# Altium PCB ButtonInterface.PcbDoc
Units mm, origin at the board's own origin, x right, y up, seen from the top; angles counter-clockwise.
Board outline 57.82 x 17.85 mm, 2 copper layers (Top Layer, Bottom Layer); 9 components, 9 nets, 34 pads, 0 vias.
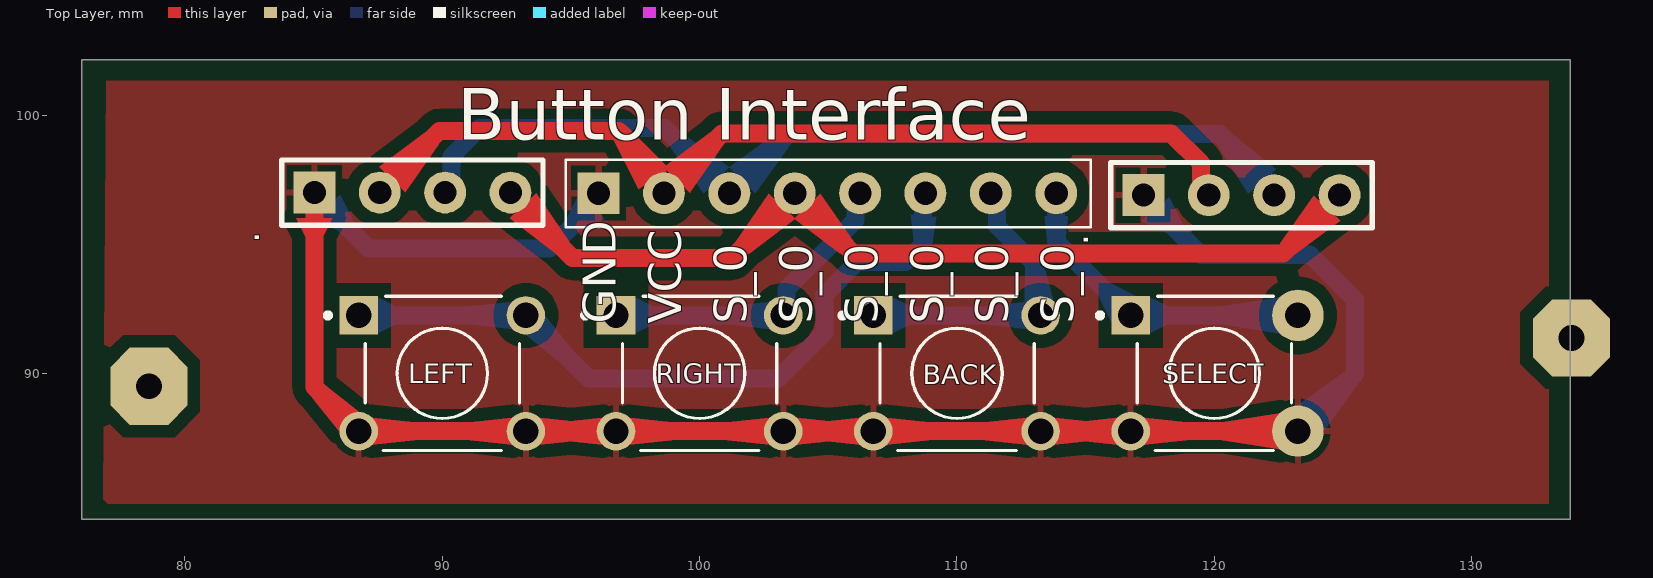
[diagram p0: Top Layer view]
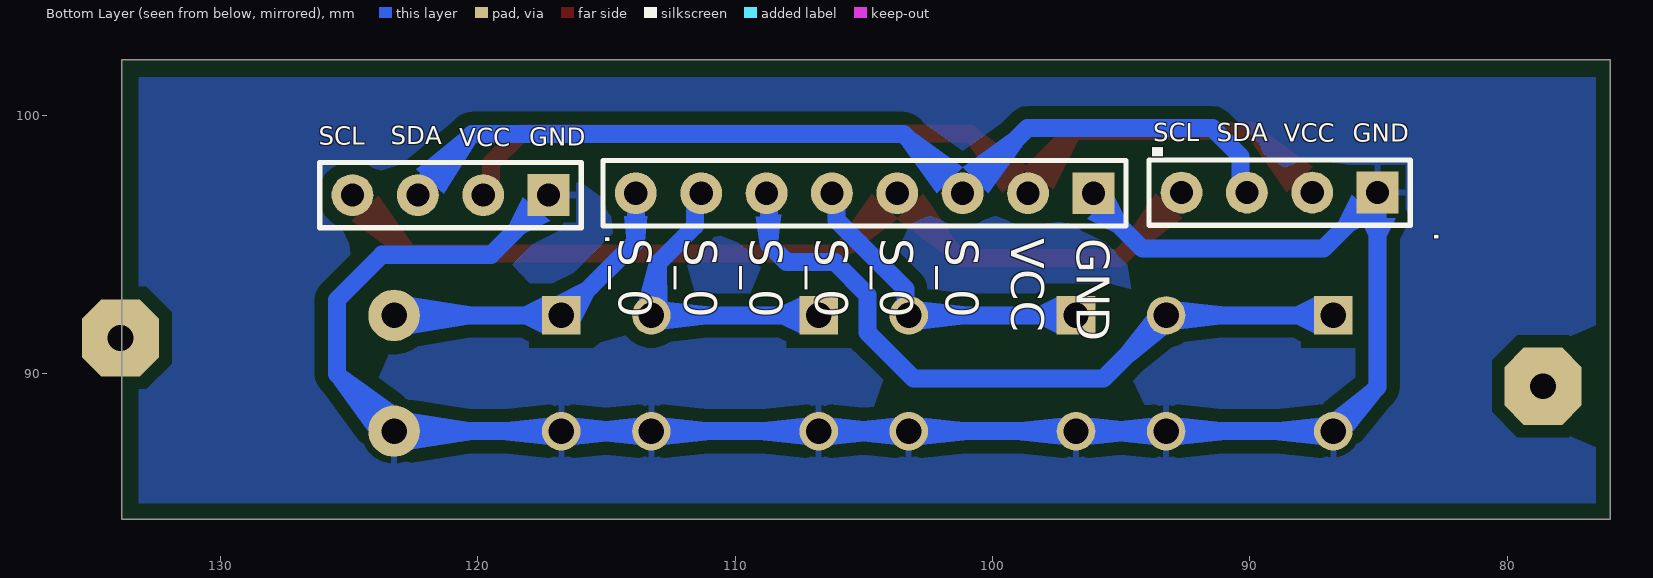
[diagram p1: Bottom Layer view, seen from below]

## Layer stack, top to bottom
Top Solder: solder mask 0.0102, Solder Resist, Dk 3.5
Top Layer: signal copper 0.0356
Dielectric 1: dielectric 0.32, FR-4, Dk 4.8
Bottom Layer: signal copper 0.0356
Bottom Solder: solder mask 0.0102, Solder Resist, Dk 3.5

## Board outline
76,84.325 76,102.175 133.825,102.175 133.825,84.325

## Design rules (kind name [scope] priority, off if disabled: settings)
Clearance [All] p1: gap=0.5 ignorepadtopadclearanceinfootprint=TRUE
PolygonConnect [All] p1: connectstyle=Relief reliefconductorwidth=0.254 reliefentries=4 polygonreliefangle="90 Angle" airgapwidth=0.254
RoutingVias [All] p1: holewidth=0.711 width=1.27 viastyle="Through Hole" minholewidth=0.711 minwidth=1.27 maxholewidth=0.711 maxwidth=1.27
SolderMaskExpansion [All] p1: expansion=0.102 istentingtop=FALSE
Width [All] p1: maxlimit=1 minlimit=0.254 preferedwidth=0.7
30 further rules are at their usual default settings.

## Components (designator, comment, footprint, x,y, rotation, side; value= is the part's Value field where it differs from the comment)
BACK "BACK" SW_1825910-6-4#1 110,90 r0 top (schematic designator SW2)
CN1 "IO" CON.HDR1X4 117.245,96.925 r0 bottom
CN2 "CON.HDR1x8" CON1X8N 96.075,97 r0 bottom
CN3 "IO" CON.HDR1X4 85.03,97.025 r0 bottom
LEFT "LEFT" SW_1825910-6-4#1 90,90 r0 top (schematic designator SW3)
RIGHT "RIGHT" SW_1825910-6-4#1 100,90 r0 top (schematic designator SW4)
SELECT "SELECT" SW_1825910-6-4#2 120,90 r0 top (schematic designator SW1)
? "Comment" CP 133.875,91.375 r0 top
? "Comment" CP 78.6,89.5 r0 top

## Footprints (in the part's own frame and the unit in brackets; to place one, negate y for a bottom-side part, rotate by r counter-clockwise, add the part's x,y. Pads: shape width x height; smd on the part's side, far side on the other; paste and mask are expansions set on the pad)
CON1X8N [mil]
  rect 64x64 hole 35.43: 1(0,0)
  round 64 hole 35.43: 2(100,0) 3(200,0) 4(300,0) 5(400,0) 6(500,0) 7(600,0) 8(700,0)
  silkscreen extent -50,-50 750,50, body extent -50,-50 750,50, height 350
CON.HDR1X4 [mil]
  rect 64x64 hole 35.43: 1(0,0)
  round 64 hole 35.43: 2(100,0) 3(200,0) 4(300,0)
  silkscreen extent -50,-50 350,50, body extent -50,-50 350,50, height 350
CP [mm] "Connect Pad, 1-Pin"
  oct 3x3 hole 1: 1(0,0)
SW_1825910-6-4#1 [mm]
  rect 1.498x1.498 / inner round 1.498 / far side rect 1.498x1.498 hole 0.99: 1(-3.25,2.25)
  round 1.498 hole 0.99: 2(3.25,2.25) 3(-3.25,-2.25) 4(3.25,-2.25)
  silkscreen extent -4.54,-3 3,3, body extent -3,-3.9 3,3.9, height 5.01
SW_1825910-6-4#2 [mm]
  rect 1.498x1.498 / inner round 1.498 / far side rect 1.498x1.498 hole 0.99: 1(-3.25,2.25)
  round 2 hole 0.99: 2(3.25,2.25) 4(3.25,-2.25)
  round 1.498 hole 0.99: 3(-3.25,-2.25)
  silkscreen extent -4.54,-3 3,3, body extent -3,-3.9 3,3.9, height 5.01

## Part data
BACK LEFT RIGHT SELECT: library part 1825910-6, "Switch Push Button OFF (ON) SPST Round Button 0.05A 24VDC Momentary Contact PC Pins Thru-Hole", Package=None, Check_prices=https://www.snapeda.com/parts/1825910-6/TE+Connectivity+ALCOSWITCH+Switches/view-part/?ref=eda, Digi-Key_Part_Number=450-1650-ND, MF="TE Connectivity", MP=1825910-6, Purchase-URL=https://pricing.snapeda.com/search/part/1825910-6/?ref=eda, SnapEDA_Link=https://www.snapeda.com/parts/1825910-6/TE+Connectivity+ALCOSWITCH+Switches/view-part/?ref=snap
CN1 CN3: library part CON.HDR1x4, "Header 1x4", ComponentLink1Description="Digikey Part link", ComponentLink2Description="Open DataSheet", ComponentLink2URL=H:\LIBRARY\LIBRARY.Datasheet\, Publisher="Hoang Nguyen"
CN2: "Header 1x8", ComponentLink1Description="Digikey Part link", ComponentLink2Description="Open DataSheet", ComponentLink2URL=H:\LIBRARY\LIBRARY.Datasheet\, Publisher="Hoang Nguyen"

## Nets (pads, with @x,y where several pads share a name; then routed paths per layer and width w, separated by ;. In a path a pad name is that pad's centre, name@x,y a point inside that pad or via, vN(x,y) a via of type N, cw(c..) or ccw(c..) an arc to the next point about the centre after c; other vN are vias at no path point)
+3.3: CN1.2 CN2.2 CN3.2 | length 36.1
  Top Layer w0.7: CN3.2@87.575,97.05 87.575,97.106 89.894,99.425 96.852,99.425 98.366,97.911 ; CN2.2 98.615,97.06 98.615,97.076 100.864,99.325 118.322,99.325 119.476,98.171 119.476,97.199 CN1.2@119.725,96.95
+5: 
GPIO17: CN2.5 RIGHT.1 RIGHT.2 | length 12.6
  Bottom Layer w0.7: RIGHT.1@96.675,92.3 96.675,92.25 RIGHT.1 RIGHT.2 ; RIGHT.2@103.196,92.304 103.374,92.482 103.374,93.271 105.152,95.049 106.058,95.955 106.058,96.823 CN2.5
GPIO18: CN2.6 LEFT.1 LEFT.2 | length 28
  Bottom Layer w0.7: LEFT.1 LEFT.2@93.225,92.25 ; LEFT.2 LEFT.2@93.225,92.25 ; CN2.6 108.683,96.908 108.683,95.008 108,94.325 106.125,94.325 104.85,93.05 104.85,91.589 103.061,89.8 95.675,89.8 LEFT.2@93.225,92.25
GPIO19: BACK.1 BACK.2 CN2.7 | length 11.9
  Bottom Layer w0.7: BACK.1 BACK.2@113,92.25 ; CN2.7@111.35,96.925 111.546,96.729 111.546,95.732 113,94.278 BACK.2@113,92.25 ; BACK.2@113.138,92.238 BACK.2@113.2,92.175 ; BACK.2 BACK.2@113,92.25
GPIO23: CN2.8 SELECT.1 SELECT.2 | length 12.6
  Bottom Layer w0.7: CN2.8 113.855,95.12 116.326,92.649 116.351,92.649 SELECT.1 ; SELECT.1@116.75,92.225 SELECT.1 ; SELECT.2@123.275,92.175 123.275,92.25 SELECT.2 SELECT.1
"Out -": BACK.3 BACK.4 CN1.1 CN2.1 CN3.1 LEFT.3 LEFT.4 RIGHT.3 RIGHT.4 SELECT.3 SELECT.4 | length 121.8
  Top Layer w0.7: CN3.1 85.03,89.47 86.7,87.8 LEFT.3@86.7,87.775 ; LEFT.3 LEFT.4 RIGHT.3 RIGHT.4 BACK.3@106.7,87.75 ; BACK.3 BACK.4 SELECT.3 SELECT.4 SELECT.4@123.35,87.75
  Bottom Layer w0.7: CN3.1@84.95,97 CN3.1@85.03,97 ; LEFT.4@93.225,87.75 LEFT.3 85.03,89.47 CN3.1@85.03,97 ; LEFT.4 RIGHT.3@96.7,87.75 ; CN2.1 96.075,96.75 94.175,94.85 87.129,94.85 85.68,96.299 85.68,96.375 85.055,97 CN3.1@85.03,97 ; RIGHT.3 RIGHT.4 BACK.3 BACK.4 SELECT.3@116.675,87.75 ; SELECT.3 SELECT.4@123.15,87.75 ; CN1.1 117.895,96.275 117.895,96.199 119.486,94.607 123.718,94.607 125.475,92.85 125.475,89.975 SELECT.4
SCL: CN1.4 CN2.4 CN3.4 | length 36.3
  Top Layer w0.7: CN3.4@92.575,97 92.575,96.965 95.065,94.475 101.246,94.475 CN2.4@103.695,96.924 ; CN2.4 CN2.4@103.695,96.924 ; CN1.4@124.825,96.875 124.825,96.809 122.666,94.65 105.969,94.65 CN2.4@103.695,96.924
SDA: CN1.3 CN2.3 CN3.3 | length 36.9
  Bottom Layer w0.7: CN3.3@90.075,97.125 90.359,97.409 90.359,98.434 91.45,99.525 98.63,99.525 CN2.3@101.055,97.1 ; CN2.3 103.455,99.3 120.225,99.3 122.275,97.25 CN1.3@122.275,96.875
pads on no net: ?.1

## Polygon pours and split planes (outlines as drawn)
"Out -" on Bottom Layer "OUT_-_L02_P000" (solid, pour order 0): 76.55,101.5 133.175,101.5 133.175,84.95 76.55,84.95
"Out -" on Top Layer "NONET_L02_P-001" (solid, pour order 1): 76.95,101.375 133,101.375 133,84.925 76.825,84.925

## Silkscreen, mask and mechanical layers (free items; w line width, h text height)
Top Overlay:
  text "Button Interface" at 90.575,99.075 h2
Bottom Overlay:
  text "SDA" at 91.275,99.025 h0.7
  text "SCL" at 93.75,99.025 h0.7
  text "GND" at 86,99 h0.7
  text "VCC" at 88.675,99 h0.7
  text "SDA" at 123.375,98.9 h0.7
  text "SCL" at 126.175,98.875 h0.7
  text "GND" at 118,98.85 h0.7
  text "VCC" at 120.725,98.825 h0.7
Mechanical 1:
  the board outline again, w0.254

## Text inside footprints (layer, text, board x,y; h text height)
CN2: Top Overlay "GND" at 96.748,91.919 h1.27 r90; Top Overlay "VCC" at 99.29,91.919 h1.27 r90; Top Overlay "S_0" at 101.832,91.919 h1.27 r90; Top Overlay "S_0" at 104.374,91.919 h1.27 r90; Top Overlay "S_0" at 106.916,91.919 h1.27 r90; Top Overlay "S_0" at 109.458,91.919 h1.27 r90; Top Overlay "S_0" at 112,91.919 h1.27 r90; Top Overlay "S_0" at 114.542,91.919 h1.27 r90; Bottom Overlay "GND" at 96.723,95.247 h1.27 r90; Bottom Overlay "VCC" at 99.265,95.247 h1.27 r90; Bottom Overlay "S_0" at 101.807,95.247 h1.27 r90; Bottom Overlay "S_0" at 104.349,95.247 h1.27 r90; Bottom Overlay "S_0" at 106.89,95.247 h1.27 r90; Bottom Overlay "S_0" at 109.432,95.247 h1.27 r90; Bottom Overlay "S_0" at 111.974,95.247 h1.27 r90; Bottom Overlay "S_0" at 114.516,95.247 h1.27 r90